# EAGLE board 04-PID_Motor_Control (EAGLE 9.7.0)

Size 183.18 x 91.47 mm. Coordinates in mm from the lower left corner, seen from the top.
Outline: 0,0 183.18,0 183.18,91.47 0,91.47 0,0
Copper layers (1*16): Top 0.035mm / dielectric 1.5mm / Bottom 0.035mm
Design rules "default": minimum track width 6mil, minimum drill 0.35mm, track to track 6mil, track to pad 6mil, pad to pad 6mil, via to via 6mil, smd to smd 6mil, copper to edge 40mil, drill to drill 6mil, minimum pad ring 10mil, minimum via ring 8mil, stop-mask expansion 4mil, vias tented up to drill 0mil, thermal gap 10mil

## Footprints (pad centres in the part's own frame; a part is rotated, then mirrored left to right if it is on the bottom)
LEDRD254W60D565H860B = drill 0.981 pad 1.581: 1 -1.27,0; 2 1.27,0
1X06 = drill 1.016 long: 1 -6.35,0; 2 -3.81,0; 3 -1.27,0; 4 1.27,0; 5 3.81,0; 6 6.35,0
RESAD1016W63L850D250B = drill 0.83 pad 1.43: 1 -5.08,0; 2 5.08,0
SWITCH-MOMENTARY-PTH-6.5MM = drill 1.016 pad 1.88: 1 -3.251,2.261; 2 3.251,2.261; 3 -3.251,-2.261; 4 3.251,-2.261
ARDUINO-UNO-R3-SHIELD = drill 1.016 pad 1.88: 3.3V 24.13,-2.54; 5V 24.13,0; A0 24.13,12.7; A1 24.13,15.24; A2 24.13,17.78; A3 24.13,20.32; A4 24.13,22.86; A5 24.13,25.4; AREF -24.13,-13.97; D2 -24.13,20.32; D3 -24.13,17.78; D4 -24.13,15.24; D5 -24.13,12.7; D6 -24.13,10.16; D7 -24.13,7.62; D8 -24.13,3.81; D9 -24.13,1.27; D10 -24.13,-1.27; D11 -24.13,-3.81; D12 -24.13,-6.35; D13 -24.13,-8.89; GND@0 24.13,2.54; GND@1 24.13,5.08; GND@2 -24.13,-11.43; IOREF 24.13,-7.62; NC 24.13,-10.16; RES 24.13,-5.08; RX -24.13,25.4; SCL -24.13,-19.05; SDA -24.13,-16.51; TX -24.13,22.86; VIN 24.13,7.62
DIP762W53P254L1969H508Q16B = drill 0.743 pad 1.343: 1 -3.81,8.89; 2 -3.81,6.35; 3 -3.81,3.81; 4 -3.81,1.27; 5 -3.81,-1.27; 6 -3.81,-3.81; 7 -3.81,-6.35; 8 -3.81,-8.89; 9 3.81,-8.89; 10 3.81,-6.35; 11 3.81,-3.81; 12 3.81,-1.27; 13 3.81,1.27; 14 3.81,3.81; 15 3.81,6.35; 16 3.81,8.89

## Placement (x,y rotation side)
D1  RED  [LEDRD254W60D565H860B]  177.12,25.51 180 top
M1  PINHD-1X06_1X06M  [1X06]  89.68,84.78 0 top
M2  PINHD-1X06_1X06M  [1X06]  126.27,85.19 0 top
R1  220  [RESAD1016W63L850D250B]  175.85,12.81 90 top
S1  SWITCH_MOMENTARY  [SWITCH-MOMENTARY-PTH-6.5MM]  119.97,36.94 90 top
S2  SWITCH_MOMENTARY  [SWITCH-MOMENTARY-PTH-6.5MM]  119.97,21.7 90 top
U1  ARDUINO-UNO-R3-SHIELD  [ARDUINO-UNO-R3-SHIELD]  47.88,29.84 270 top
U2  L293E  [DIP762W53P254L1969H508Q16B]  144.1,29.32 90 top

## Library data of the parts
D1 = Tinkercad; CATEGORY: Opto-Electronic; SUB-CATEGORY: LED; VALUE: LED_RED
M1 M2 R1 S1 S2 U1 U2 = Tinkercad

## Nets
M1_2: M1.2 U1.D3
M2_2: M2.2 U1.D5
U1_5V: M1.3 M2.3 U1.5V U2.8 U2.16
U1_A2: D1.1 U1.A2
U1_D2: M1.4 U1.D2
U1_D4: M2.4 U1.D4
U1_D6: U1.D6 U2.2
U1_D7: U1.D7 U2.7
U1_D8: U1.D8 U2.10
U1_D9: U1.D9 U2.15
U1_D10: U1.D10 U2.1
U1_D11: U1.D11 U2.9
U1_D12: S1.1 S1.2 U1.D12
U1_D13: S2.1 S2.2 U1.D13
U1_GND: M1.5 M2.5 R1.1 S1.3 S1.4 S2.3 S2.4 U1.GND@0 U1.GND@1 U1.GND@2 U2.4 U2.5 U2.12 U2.13
U2_1Y: M1.1 U2.3
U2_2Y: M1.6 U2.6
U2_3Y: M2.1 U2.11
U2_4Y: M2.6 U2.14

## Tracks (layer width: path | path; a pad name or v marks a point on that pad's centre or on a via)
M1_2  (1 unrouted)
M2_2  (1 unrouted)
U1_5V  (4 unrouted)
U1_A2  (1 unrouted)
U1_D2  (1 unrouted)
U1_D4  (1 unrouted)
U1_D6  (1 unrouted)
U1_D7  (1 unrouted)
U1_D8  (1 unrouted)
U1_D9  (1 unrouted)
U1_D10  (1 unrouted)
U1_D11  (1 unrouted)
U1_D12  (2 unrouted)
U1_D13  (2 unrouted)
U1_GND  (13 unrouted)
U2_1Y  (1 unrouted)
U2_2Y  (1 unrouted)
U2_3Y  (1 unrouted)
U2_4Y  (1 unrouted)